# Altium PCB PCB1.PcbDoc
Units mil, origin at the board's own origin, x right, y up, seen from the top; angles counter-clockwise.
Board outline 6000 x 4000 mil, 2 copper layers (Top Layer, Bottom Layer); 22 components, 22 nets, 61 pads, 0 vias.
Unrouted connection lines stored in the file: 15.
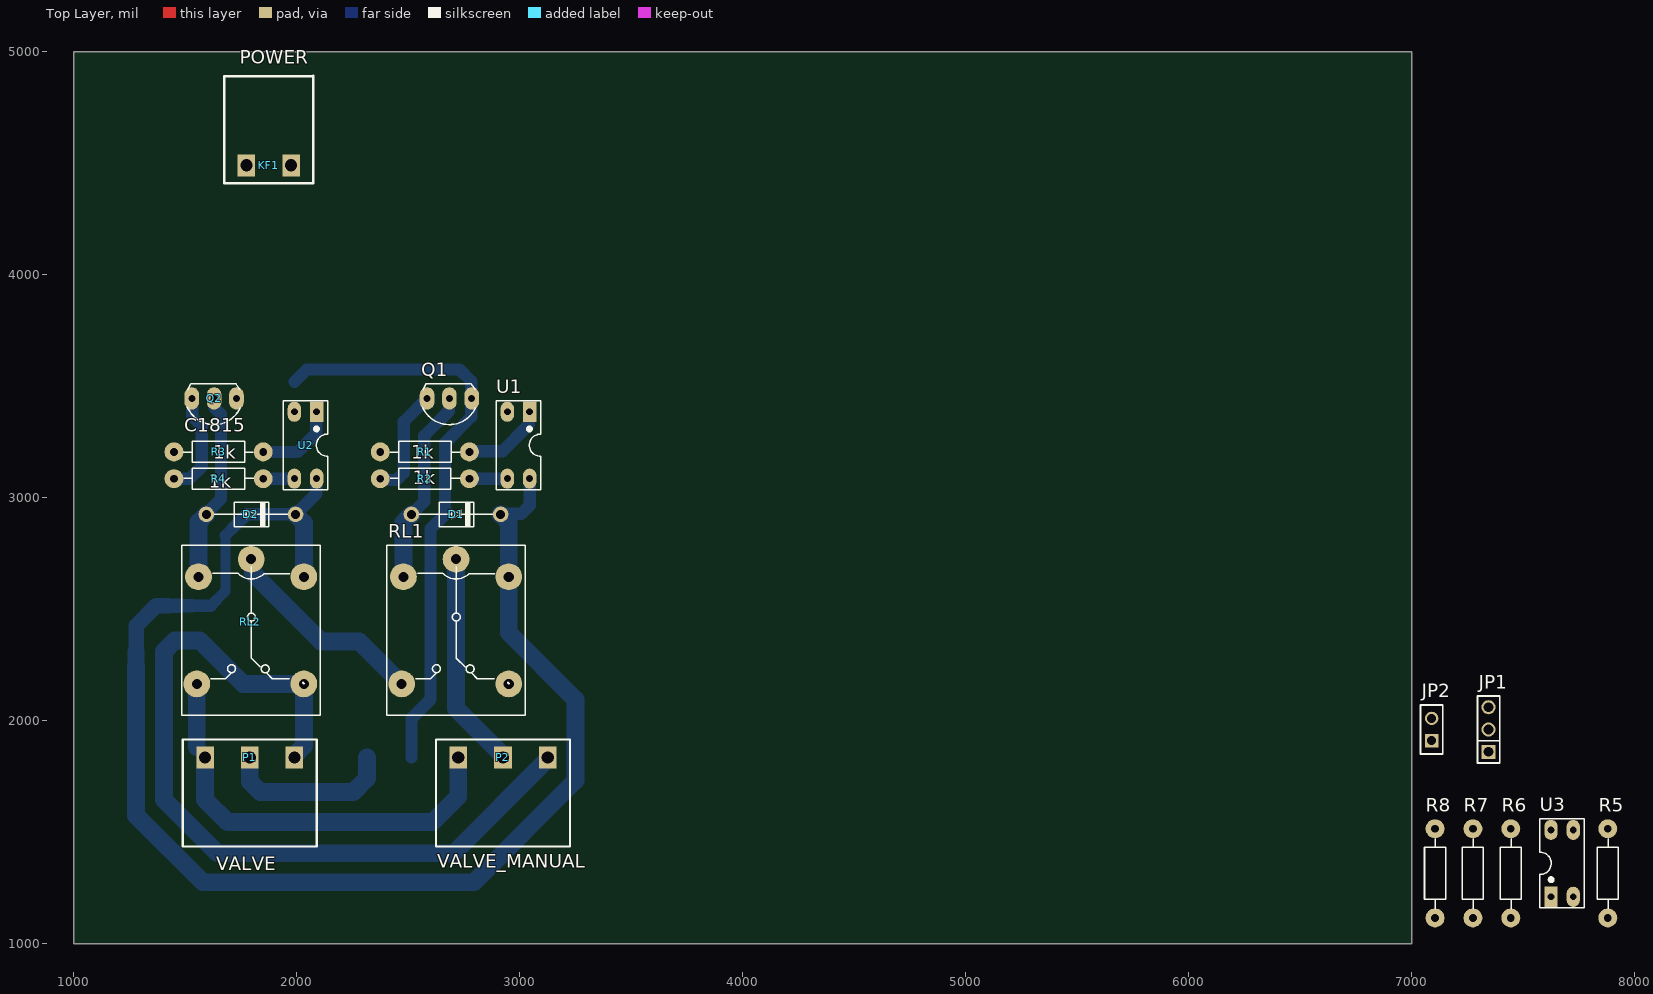
[diagram p0: Top Layer view]
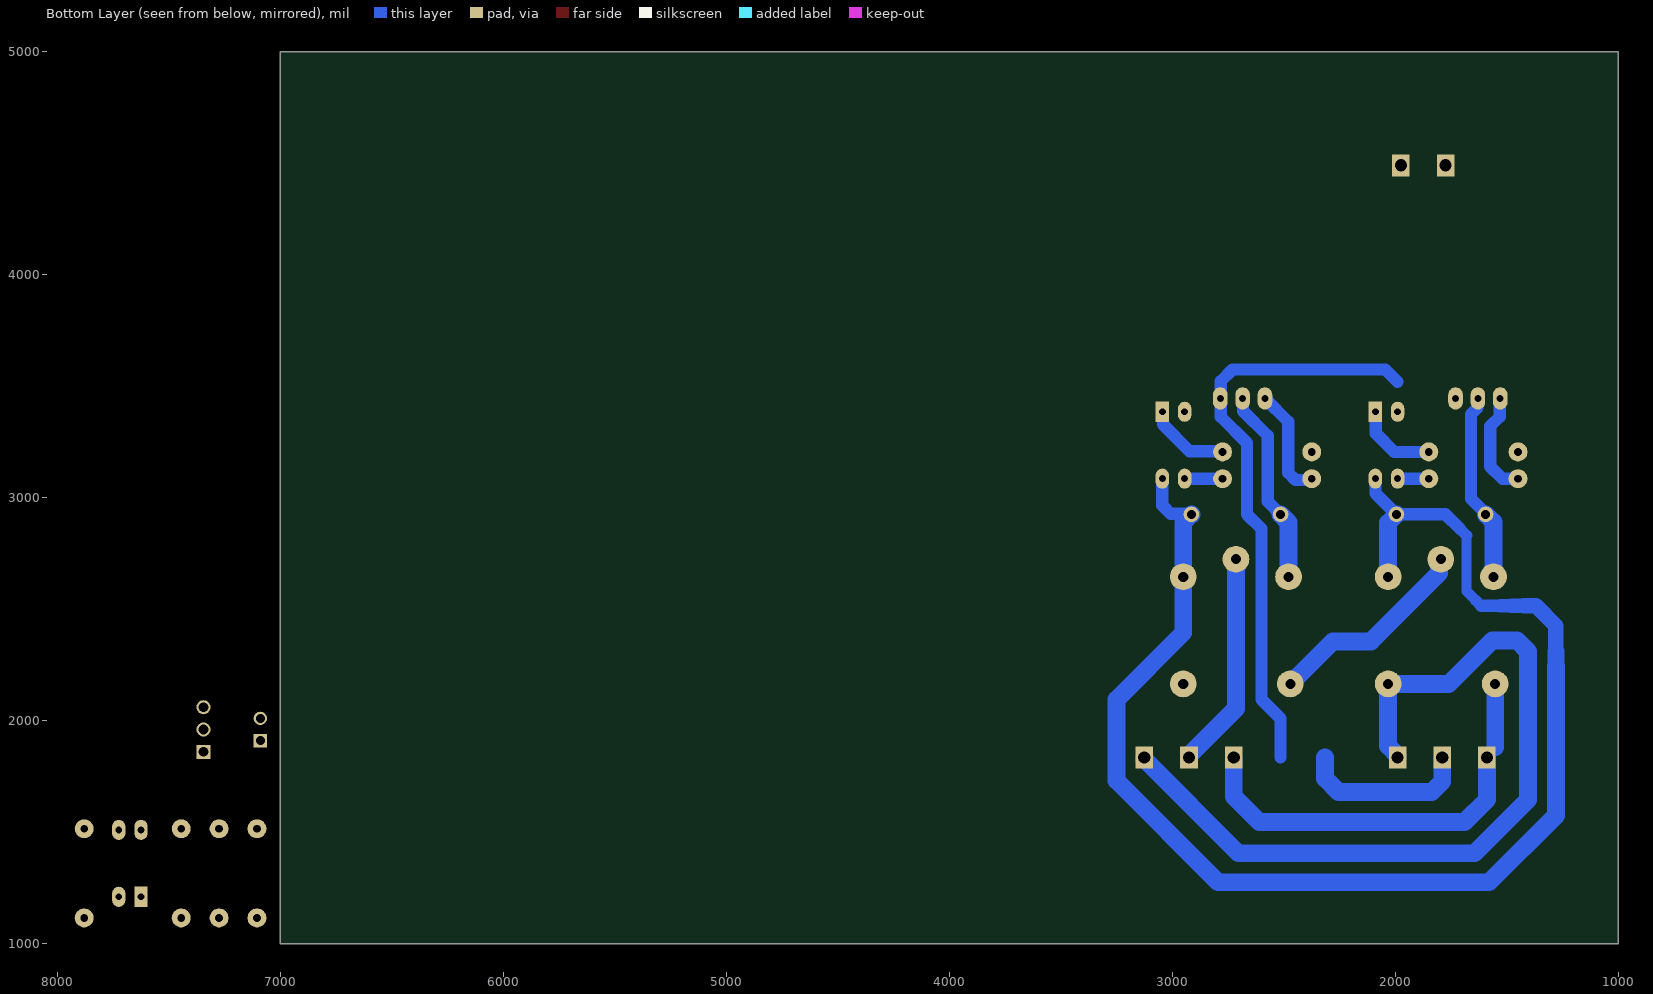
[diagram p1: Bottom Layer view, seen from below]

## Layer stack, top to bottom
Top Solder: solder mask 0.4, Solder Resist, Dk 3.5
Top Layer: signal copper 1.4
Dielectric 1: dielectric 12.6, FR-4, Dk 4.8
Bottom Layer: signal copper 1.4
Bottom Solder: solder mask 0.4, Solder Resist, Dk 3.5

## Board outline
1000,1000 7000,1000 7000,5000 1000,5000

## Design rules (kind name [scope] priority, off if disabled: settings)
Clearance [All] p1: gap=25 ignorepadtopadclearanceinfootprint=FALSE
PolygonConnect [All] p1: connectstyle=Relief reliefconductorwidth=10 reliefentries=4 polygonreliefangle="90 Angle" airgapwidth=10
RoutingVias [All] p1: holewidth=28 width=50 viastyle="Through Hole" minholewidth=28 minwidth=50 maxholewidth=28 maxwidth=50
SolderMaskExpansion [All] p1: expansion=4 istentingtop=FALSE
Width [All] p1: maxlimit=80 minlimit=40 preferedwidth=55
30 further rules are at their usual default settings.

## Components (designator, comment, footprint, x,y, rotation, side; value= is the part's Value field where it differs from the comment)
D1 "Diode" DIO-1A 2515,2925 r0 top value=1N5007
D2 "Diode" DIO-1A 1595,2925 r0 top value=1N5007
JP1 "Flow sensor" "JP 1x3 DT" 7345,1860 r90 top
JP2 "Water Leak Sensor" "JP 1x2 CT" 7090,1910 r90 top
KF1 "POWER" "CON 2 2EDG5.08" 1775,4490 r0 top
P1 "VALVE" "CON 3 3EDG5.08" 1990,1835 r180 top
P2 "VALVE_MANUAL" "CON 3 3EDG5.08" 3125.5,1835 r180 top
Q1 "C1815" TO92 2685,3445 r180 top value=C9014
Q2 "C1815" TO92 1630,3445 r180 top value=C9014
R1 "1k" RES-1/4W 2590,3200 r0 top
R2 "1k" RES-1/4W 2560,3090 r180 top
R3 "1k" RES-1/4W 1665,3200 r0 top
R4 "1k" RES-1/4W 1635,3090 r180 top
R5 "10k" RES-1/4W 7885,1330 r90 top
R6 "1k" RES-1/4W 7450,1330 r90 top
R7 "10k" RES-1/4W 7280,1330 r90 top
R8 "10k" RES-1/4W 7110,1330 r90 top
RL1 "Relay" "Relay 5 Chan SRD" 2715,2723.74 r270 top
RL2 "Relay" "Relay 5 Chan SRD" 1796.22,2723.74 r270 top
U1 "PC817" DIP4 3045,3385 r180 top
U2 "PC817" DIP4 2090,3385 r180 top
U3 "PC817" DIP4 7625,1210 r0 top

## Footprints (in the part's own frame and the unit in brackets; to place one, negate y for a bottom-side part, rotate by r counter-clockwise, add the part's x,y. Pads: shape width x height; smd on the part's side, far side on the other; paste and mask are expansions set on the pad)
"CON 2 2EDG5.08" [mm]
  rect 2x2.5 hole 1.4: 1(0,0) 2(5.08,0)
  silkscreen extent -2.54,-2.03 7.62,10.21, body extent -2.5,-1.75 7.58,10.25, height 3.15
"CON 3 3EDG5.08" [mm]
  rect 2x2.5 hole 1.4: 1(0,0) 2(5.08,0) 3(10.173,0)
  silkscreen extent -2.54,-2.03 12.71,10.16, body extent -2.5,-1.75 12.67,10.25, height 3.15
DIO-1A [mil]
  round 70 hole 40: 1(0,0) 2(400,0)
  silkscreen extent 35,-55 365,55, body extent -11,-50 411,54, height 102
DIP4 [mil]
  rect 60x90 hole 31: 1(0,0)
  oval 60x90 hole 31: 2(100,0) 3(100,300) 4(0,300)
  silkscreen extent -50,-50 150,350, body extent -59,-10 159,305, height 170
"JP 1x2 CT" [mm] "JP 1x2 CT"
  rect 1.52x1.52 hole 1.02: 1(0,0)
  round 1.52 hole 1.02: 2(2.54,0)
  silkscreen extent -1.52,-1.27 4.06,1.27, body extent -1.52,-1.25 4.06,1.25, height 8.51
"JP 1x3 DT" [mm]
  rect 1.6x1.6 hole 1.1: 1(0,0)
  round 1.6 hole 1.1: 2(2.54,0) 3(5.08,0)
  silkscreen extent -1.27,-1.27 6.35,1.27, body extent -1.27,-1.27 6.35,1.27, height 8.54
"Relay 5 Chan SRD" [mil] "Relay SPDT, 5 pin, 10A,W 650mil, L 800mil, H 800mil"
  round 120 hole 45: 1(0,0) 2(559.06,236.22) 3(559.06,-243.78) 4(78.74,-236.22) 5(78.74,236.22)
  silkscreen extent -63,-311 700,310, body extent -55,-306 697,304, height 602
RES-1/4W [mil]
  round 85 hole 35: 1(-215,5) 2(185,5)
  silkscreen extent -173,-42 141,52, body extent -227,-42 197,52, height 95
TO92 [mil] "TO-92"
  oval 66x100 hole 32: 1(-100,0) 2(0,0) 3(100,0)
  silkscreen extent -117,-65 120,118, body extent -109,-66 109,95, height 245

## Part data
D1 D2: "Default Diode", Code - JEDEC=DO-214-AB, Published=8-Jun-2000, Publisher="Altium Limited", Revision="July-2002: Re-released for DXP Platform."
JP1: library part "JP 1x3 2.54 Duc Thang", "Cắm", Chung_Loai=Cắm, Don_Vi=Con, Ma_Hang=MH000903, Ten_Linh_Kien="Jump Đơn Đực 2.54MM 1x40P Thẳng 11MM"
JP2: library part "JP 1x2 2.54 Cai Thang", "Cắm", Chung_Loai=Cắm, Don_Vi=Con, Ma_Hang=MH004006, Ten_Linh_Kien="Jump Đơn Cái 2.54MM 1x20P Thẳng"
KF1: library part "CON 2 EDG5.08", "Cắm", Chung_Loai=Cắm, Don_Vi=Con, Ma_Hang=MH000759, Ten_Linh_Kien="CON 2 2EDG5.08-2P 5.08MM ( Xanh Cong)"
P1 P2: library part "CON 3 EDG5.08", "Cắm", Chung_Loai=Cắm, Don_Vi=Con, Ma_Hang=MH000760, Ten_Linh_Kien="CON 3 2EDG5.08-3P 5.08MM ( Xanh Cong)"
Q1 Q2: library part "Trans C1815 DIP", "NPN transistor"
R1 R2 R3 R4 R5 R6 R7 R8: library part Res, "Res", Manufacturer="Generic Components", Class=Passive, Published=08/06/2000, Publisher="Altium Hobart Technology Centre", SubClass=R
RL1 RL2: library part "Relay 5 Chan SRD", "Relay 5 Chan", Ma_Hang=MH009374, Ten="Relay 5V10A SRD-05VDC-SL-C Chính Hãng"
U1 U2 U3: "Single Opto"

## Nets (pads, with @x,y where several pads share a name; then routed paths per layer and width w, separated by ;. In a path a pad name is that pad's centre, name@x,y a point inside that pad or via, vN(x,y) a via of type N, cw(c..) or ccw(c..) an arc to the next point about the centre after c; other vN are vias at no path point)
+3.3: R5.2
+5: D1.2 D2.2 JP1.3 JP2.1 RL1.5 RL2.5 U1.4 U2.4 | length 6296.5
  Bottom Layer w45: 1640,2540 1680,2580 1680,2830
  Bottom Layer w50: 1615,2515 1640,2540 ; 1680,2830 1710,2860
  Bottom Layer w55: 1530,2515 1615,2515 ; 1710,2860 1775,2925 D2.2 2089.04,3019.04 2089.04,3084.04 U2.4 ; D1.2 2917.87,2927.87 3007.87,2927.87 3045,2965 U1.4
  Bottom Layer w60: 1480,2515 1530,2515
  Bottom Layer w65: 1425,2515 1480,2515
  Bottom Layer w70: 1280,2310 1280,2425 1370,2515 1425,2515
  Bottom Layer w75: 1280,2245 1280,2310
  Bottom Layer w80: 1280,2245 1280,1575 1580,1275 2795,1275 3250,1730 3250,2095 2951.22,2393.78 RL1.5 2951.22,2888.78 D1.2 ; D2.2 2032.44,2887.56 RL2.5
ADC_voltage: R7.1 R8.2
FLOW: JP1.2
GND: JP1.1 KF1.1 P1.2 Q1.1 Q2.1 R8.1 U3.2 U3.3 | length 3437.8
  Bottom Layer w55: Q2.1@1730,3430.98 Q2.1 ; 1990,3520 2045,3575 2730,3575 2782.9,3522.1 2782.9,3447.1 Q1.1 ; 2515,1835 2515,2010 2600,2095 2600,2860 2665,2925 2665,3245 2782.9,3362.9 2782.9,3442.9 Q1.1 ; Q1.1@2785,3430.98 Q1.1
  Bottom Layer w80: P1.2 1790,1726.86 1836.86,1680 2255,1680 2315,1740 2315,1835
M_CLOSE: P1.3 P2.3 RL2.3 | length 1873.3
  Bottom Layer w80: P1.3@1552.44,1880.64 RL2.3 ; P1.3 1589.5,1645.5 1690,1545 2610,1545 2725,1660 P2.3
M_OPEN: P1.1 P2.1 RL2.2 | length 3744.4
  Bottom Layer w80: P1.1 1990,1843.58 2032.44,1886.02 RL2.2 1760.32,2164.68 1565,2360 1455,2360 1405,2310 1405,1645 1645,1405 2704.08,1405 3125.5,1826.42 P2.1
NetD1_1: D1.1 Q1.2 RL1.4 | length 885.4
  Bottom Layer w55: D1.1 2572.5,2982.5 2572.5,3277.5 2682.9,3387.9 2682.9,3442.9 Q1.2
  Bottom Layer w80: RL1.4 2478.78,2888.78 D1.1
NetD2_1: D2.1 Q2.2 RL2.4 | length 854.7
  Bottom Layer w55: D2.1 1595,2929.06 1661.04,2995.1 1661.04,3373.96 1632.1,3402.9 1632.1,3442.9 Q2.2
  Bottom Layer w80: RL2.4 1560,2890 D2.1
NetQ1_3: Q1.3 R2.2 | length 497.7
  Bottom Layer w55: R2.2 2380.74,3079.26 2447.78,3079.26 2480,3111.48 2480,3340 Q1.3
NetQ2_3: Q2.3 R4.2 | length 471.4
  Bottom Layer w55: R4.2 1520,3085 1575,3140 1575,3320 1532.1,3362.9 1532.1,3442.9 Q2.3
NetR1_2: R1.2 U1.1 | length 376.8
  Bottom Layer w55: R1.2 2778.33,3208.33 2923.33,3208.33 3042.5,3327.5 3042.5,3382.5 U1.1
NetR2_1: R2.1 U1.3 | length 170
  Bottom Layer w55: R2.1 U1.3
NetR3_2: R3.2 U2.1 | length 370.2
  Bottom Layer w55: R3.2 2005,3205 2087.5,3287.5 2087.5,3382.5 U2.1
NetR4_1: R4.1 U2.3 | length 140
  Bottom Layer w55: R4.1 U2.3
NetR6_2: R6.2 U3.1
R1: U1.2
R2: U2.2
VCC: KF1.2 P2.2 R7.2 RL1.1 | length 975.9
  Bottom Layer w80: RL1.1 2715,2054.08 2925.5,1843.58 P2.2
VCC_M+: RL1.3 RL2.1 | length 938.8
  Bottom Layer w80: RL2.1 1803.87,2716.09 1803.87,2661.13 2110,2355 2280.91,2355 RL1.3
WL_Sensor: JP2.2 R6.1
WL_Signal: R5.1 U3.4
pads on no net: R1.1 R3.1 RL1.2